# Altium PCB HIC15.PcbDoc
Units mm, origin at the board's own origin, x right, y up, seen from the top; angles counter-clockwise.
Board outline 33.3 x 27.8 mm, 2 copper layers (Top Layer, Bottom Layer), stack 1.58 mm thick; 39 components, 30 nets, 158 pads, 59 vias.
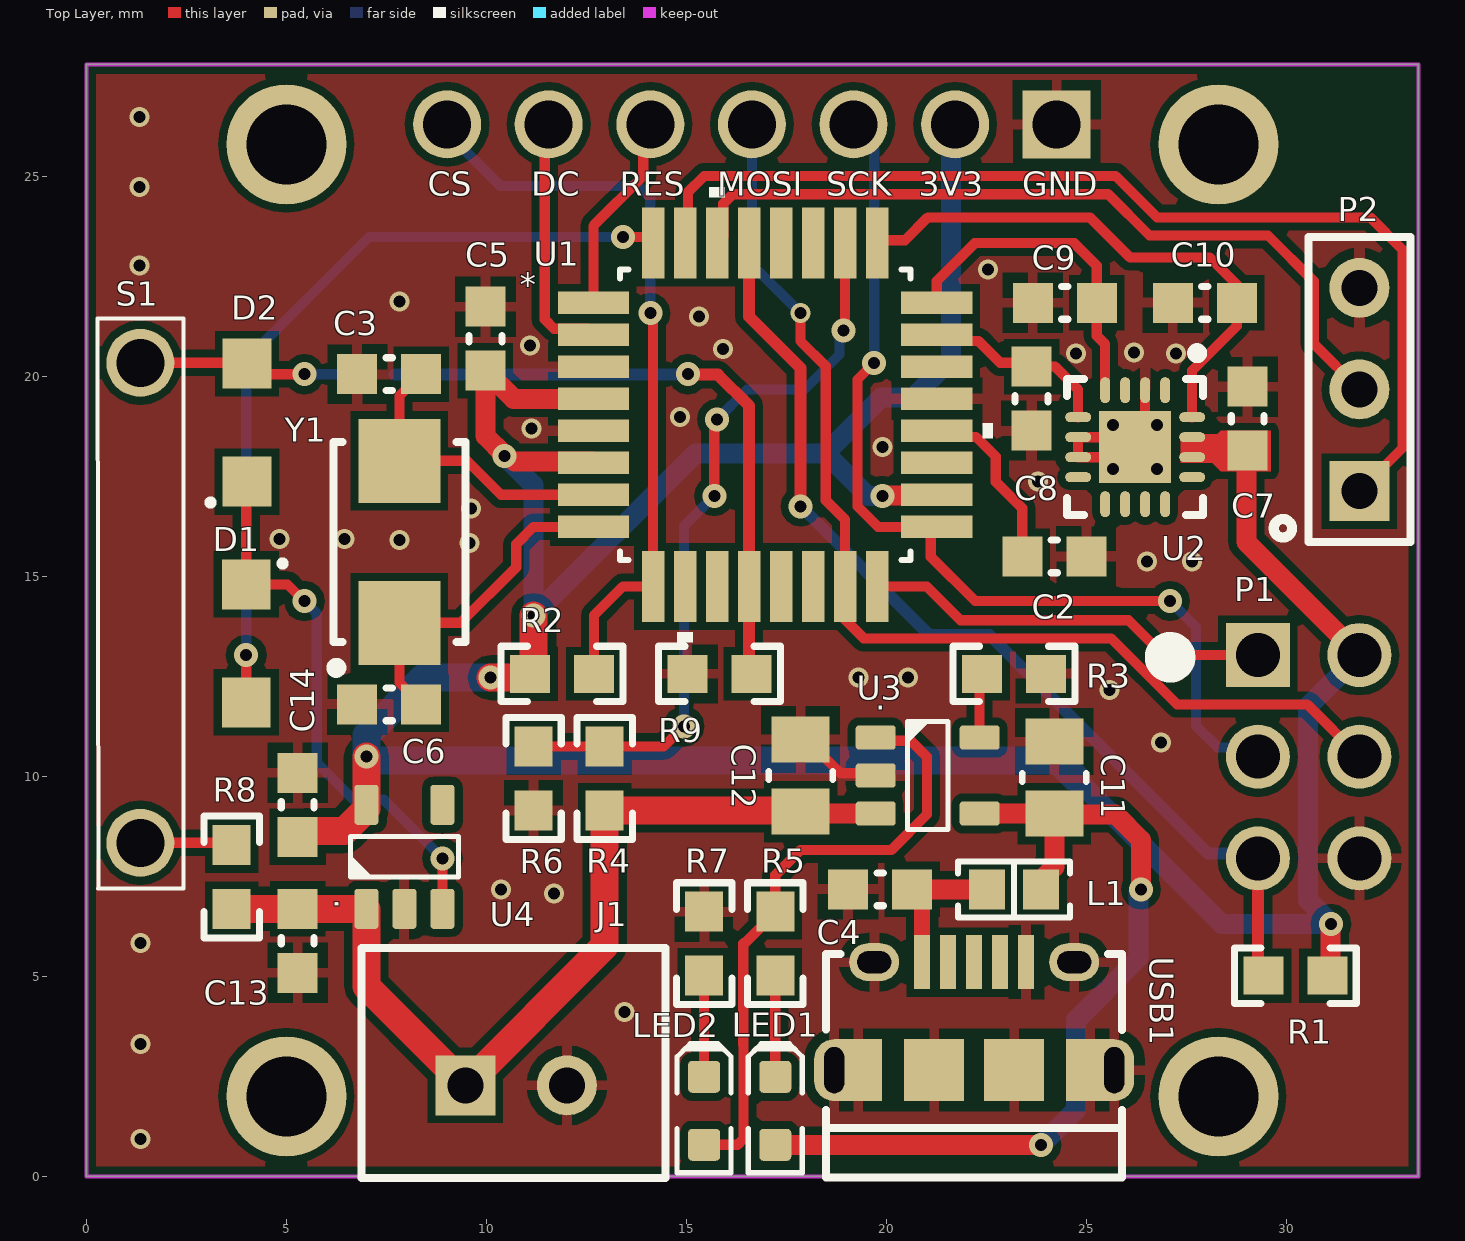
[diagram p0: Top Layer view]
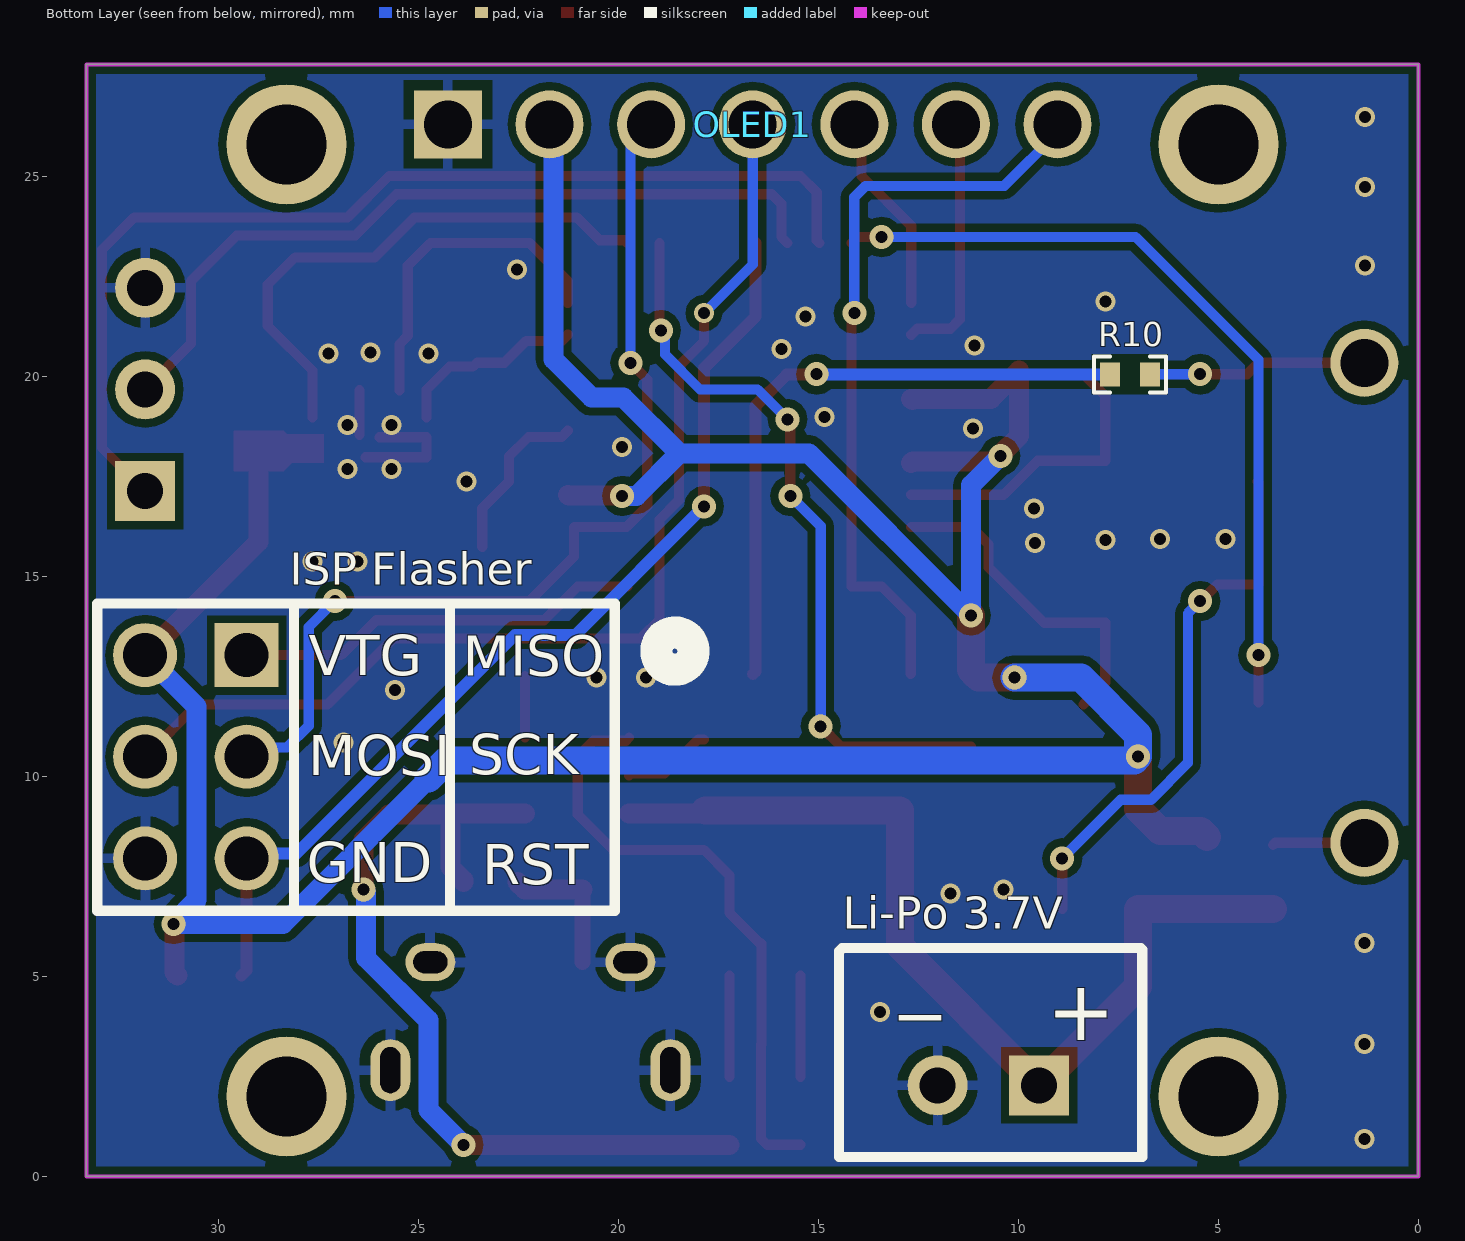
[diagram p1: Bottom Layer view, seen from below]
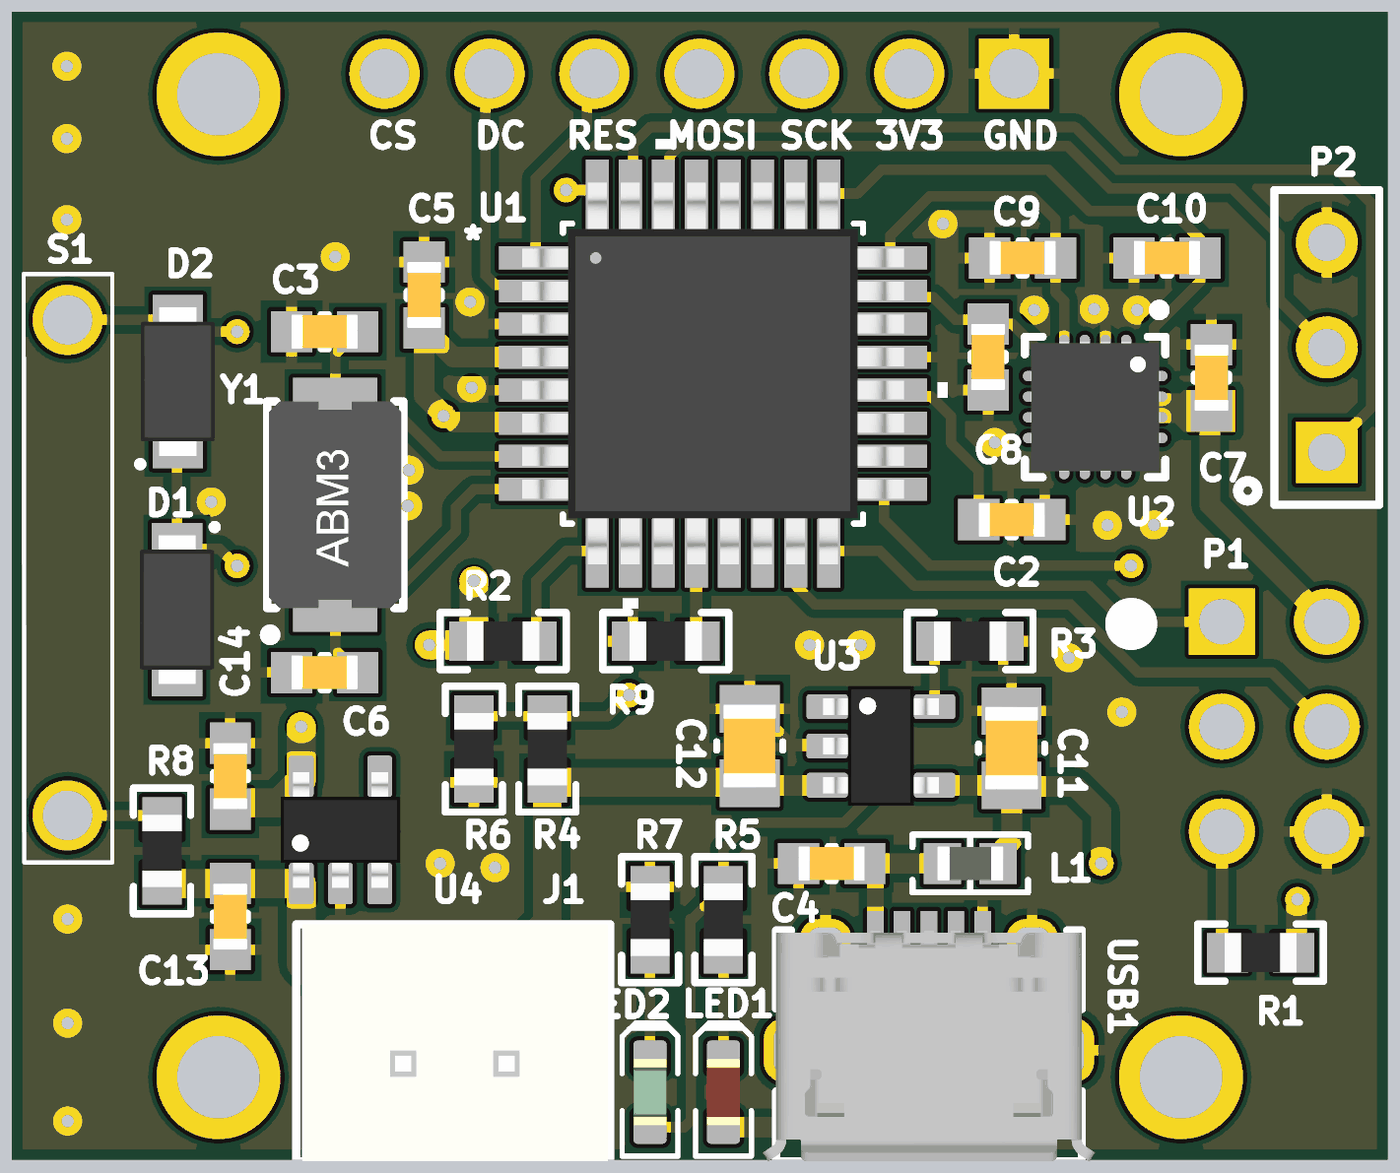
[diagram p2: 3D render of the assembled board from above, using the file's embedded part models]

## Layer stack, top to bottom
Top Solder: solder mask 0.01, Solder Resist, Dk 3.5
Top Layer: signal copper 0.036
Dielectric 1: dielectric 1.508, FR-4, Dk 4.8
Bottom Layer: signal copper 0.036
Bottom Solder: solder mask 0.01, Solder Resist, Dk 3.5

## Board outline
0,0 33.3,0 33.3,27.8 0,27.8

## Design rules (kind name [scope] priority, off if disabled: settings)
Clearance [All] p1: gap=0.2 ignorepadtopadclearanceinfootprint=FALSE except(0: Arc-Hole Track-Hole SMDPad-Hole THPad-Hole Via-Hole Fill-Hole Poly-Hole Region-Hole Text-Hole)
HoleSize [All] p1: absolutevalues=TRUE maxlimit=10 minlimit=0.025 maxpercent=80.000 minpercent=20.000
MinimumSolderMaskSliver [All] p1 off: minsoldermaskwidth=0.254
PlaneConnect [All] p1: pad.planeconnectstyle=Relief pad.reliefexpansion=0.508 pad.reliefentries=4 pad.reliefconductorwidth=0.254 pad.reliefairgap=0.254 via.planeconnectstyle=Direct via.reliefexpansion=0.508 via.reliefentries=4 via.reliefconductorwidth=0.254 via.reliefairgap=0.254
PolygonConnect [All] p1: thpad.connectstyle=Relief thpad.reliefconductorwidth=0.254 thpad.reliefentries=4 thpad.polygonreliefangle="90 Angle" thpad.airgapwidth=0.254 smdpad.connectstyle=Relief smdpad.reliefconductorwidth=0.254 smdpad.reliefentries=4 smdpad.polygonreliefangle="90 Angle" smdpad.airgapwidth=0.254 via.connectstyle=Direct via.reliefconductorwidth=0.254 via.reliefentries=4 via.polygonreliefangle="90 Angle" via.airgapwidth=0.254
RoutingVias [All] p1: holewidth=0.3 width=0.6 viastyle="Through Hole" minholewidth=0.2 minwidth=0.4 maxholewidth=5 maxwidth=10
SilkToSilkClearance [All] p1 off: silktosilkclearance=0.254
SilkToSolderMaskClearance [IsPad] p1 off: minsilkscreentomaskgap=0.254 clearancetoexposedcopper=TRUE
SolderMaskExpansion [IsVia] p1: expansion=0 soldermaskfromhole=TRUE
SolderMaskExpansion SolderMaskExpansion_1 [All] p2: expansion=0.102
Width [All] p1: maxlimit=1 minlimit=0.254 preferedwidth=0.254 minimp=50.000000 maximp=50.000000 favimp=50.000000
25 further rules are at their usual default settings.

## Components (designator, comment, footprint, x,y, rotation, side; value= is the part's Value field where it differs from the comment)
C2 "C0603" C0603 24.2,15.5 r0 top value=0.1uF
C3 "C0603" C0603 7.572,20.053 r180 top value=22pF
C4 "0603" C0603 19.844,7.175 r0 top value=10nF
C5 "C0603" C0603 9.979,20.941 r90 top value=0.1uF
C6 "C0603" C0603 7.572,11.798 r180 top value=22pF
C7 "C0603" C0603 29.035,18.94 r90 top value=0.1uF
C8 "C0603" C0603 23.631,19.441 r270 top value=5nF
C9 "C0603" C0603 24.463,21.837 r180 top value=5nF
C10 "C0603" C0603 27.962,21.837 r180 top value=5nF
C11 "0805" C0805 24.2,9.968 r270 top value=10µF
C12 "0805" C0805 17.859,10.02 r270 top value=10µF
C13 "0603" C0603 5.286,5.888 r90 top value=1uF
C14 "0603" C0603 5.286,9.288 r270 top value=1uF
D1 "MBR120VLSFT3G" SOD-123FL 3.997,13.322 r270 top value="20V 1A"
D2 "MBR120VLSFT3G" SOD-123FL 4.016,18.844 r90 top value="20V 1A"
J1 "BAT" HDR1X2 9.477,2.273 r0 top
L1 "0603" "FER 0603/1608" 23.198,7.175 r180 top value=220ohm
LED1 "LTST-C190KRKT" LED-0603-RED 17.224,1.638 r90 top
LED2 "LTST-C190KGKT" LED-0603-GREEN 15.446,1.638 r90 top
OLED1 "Header 7" CON-7 24.26,26.3 r180 bottom locked
P1 "Header 3X2" SPI_PORT 29.289,13.029 r0 top
P2 "Header 3" HDR1X3 31.829,17.132 r90 top
R1 "0603" R0603 30.225,5.014 r0 top value=10k
R2 "0603" R0603 11.89,12.56 r180 top value=10k
R3 "0603" R0603 23.193,12.56 r0 top value=2K
R4 "0603" R0603 12.96,9.944 r90 top value=28K
R5 "0603" R0603 17.224,5.814 r270 top value=470
R6 "0603" R0603 11.182,9.944 r270 top value=100K
R7 "0603" R0603 15.446,5.814 r270 top value=470
R8 "0603" R0603 3.635,7.48 r90 top value=28K
R9 "0603" R0603 15.827,12.56 r180 top value=100K
R10 "0402" R0402 7.21,20.05 r0 bottom value=10k
S1 "SW-PB" REED_SWITCH 1.349,14.338 r90 top
U1 "ATMEGA328P" 32A-M 16.97,19.037 r0 top
U2 "ADXL377" QFN50P300X300X150_HS-17L 26.221,18.228 r270 top
U3 "MCP73831T-2ACI/OT" SOT23-5 21.034,10.02 r0 top
U4 "MIC5504-3.3YM5TR" SOT23-5 7.953,7.988 r90 top value="3.3V 300mA"
USB1 "10118194-0001LF" 10118194-0001LF 22.198,2.654 r0 top
Y1 "16MHz" ABM3 7.826,15.862 r90 top

## Footprints (in the part's own frame and the unit in brackets; to place one, negate y for a bottom-side part, rotate by r counter-clockwise, add the part's x,y. Pads: shape width x height; smd on the part's side, far side on the other; paste and mask are expansions set on the pad)
32A-M [mil]
  rect 70x22 smd: 1(-169,110.25) 2(-169,78.75) 3(-169,47.25) 4(-169,15.75) 5(-169,-15.75) 6(-169,-47.25) 7(-169,-78.75) 8(-169,-110.25) 17(169,-110.25) 18(169,-78.75) 19(169,-47.25) 20(169,-15.75) 21(169,15.75) 22(169,47.25) 23(169,78.75) 24(169,110.25)
  rect 22x70 smd: 9(-110.25,-169) 10(-78.75,-169) 11(-47.25,-169) 12(-15.75,-169) 13(15.75,-169) 14(47.25,-169) 15(78.75,-169) 16(110.25,-169) 25(110.25,169) 26(78.75,169) 27(47.25,169) 28(15.75,169) 29(-15.75,169) 30(-47.25,169) 31(-78.75,169) 32(-110.25,169)
  silkscreen extent -143,-224 224,224, body extent -182,-182 182,182, height 47
10118194-0001LF [mm]
  rect 0.4x1.35 smd: 1(-1.3,2.7) 2(-0.65,2.7) 3(0,2.7) 4(0.65,2.7) 5(1.3,2.7)
  oval 1x1.55 hole 0.5 slot 1.15 at 90 deg: MT(-3.5,0) MT(3.5,0)
  rect 1.2x1.55 smd: MT(-2.9,0) MT(2.9,0)
  oval 1.25x0.95 hole 0.55 slot 0.85 at 0 deg: MT(-2.5,2.7) MT(2.5,2.7)
  rect 1.5x1.55 smd: MT(-1,0) MT(1,0)
  silkscreen extent -3.7,-2.69 3.7,2.9, body extent -4.02,-2.69 4.03,2.89, height 2.74
ABM3 [mm] "Molded Diode, 2-Leads, Body 5.00x3.20mm, IPC Medium Density"
  rect 2.1x2.05 smd: 1(-2.025,0) 2(2.025,0)
  silkscreen extent -3.27,-1.65 2.5,1.7, body extent -2.5,-1.6 2.5,1.6, height 1.3
C0603 [mm] "0603_095"
  rect 1x1 smd: 1(-0.8,0) 2(0.8,0)
  silkscreen extent -0.08,-0.41 0.08,0.41, body extent -0.93,-0.41 0.93,0.41, height 0.81
C0805 [mm] "0805 / 1.45mm height"
  rect 1.15x1.45 smd: 1(-0.9,0) 2(0.9,0)
  silkscreen extent -0.1,-0.8 0.1,0.8, body extent -1.09,-0.64 1.09,0.64, height 1.26
CON-7 [mm]
  rect 1.7x1.7 hole 1.2: 1(0,0)
  round 1.7 hole 1.2: 2(2.54,0) 3(5.08,0) 4(7.62,0) 5(10.16,0) 6(12.7,0) 7(15.24,0)
"FER 0603/1608" [mm] "Chip Ferrite, 2-Leads, Body 1.60x0.80mm, IPC Medium Density"
  rect 0.9x1 smd: 1(-0.675,0) 2(0.675,0)
  silkscreen extent -1.4,-0.7 1.4,0.7, body extent -0.8,-0.41 0.8,0.41, height 0.82
HDR1X2 [mm] "Connector; Header; 2 Position"
  rect 1.5x1.5 hole 0.9: 1(0,0)
  round 1.5 hole 0.9: 2(2.54,0)
  silkscreen extent -2.59,-2.31 5,3.43, body extent -2.46,-2.32 4.94,3.43, height 7
HDR1X3 [mm] "Connector; Header; 3 Position"
  rect 1.5x1.5 hole 0.9: 1(0,0)
  round 1.5 hole 0.9: 2(2.54,0) 3(5.08,0)
  silkscreen extent -1.27,-1.27 6.35,1.27
LED-0603-GREEN [mm]
  round 0.254 on Mech15: 0(0,0)
  rrect25% 0.8x0.8 smd: A(-0.85,0) C(0.85,0)
  silkscreen extent -1.55,-0.67 1.68,0.67, body extent -0.8,-0.4 0.8,0.4, height 0.75
LED-0603-RED [mm]
  round 0.254 on Mech15: 0(0,0)
  rrect25% 0.8x0.8 smd: A(-0.85,0) C(0.85,0)
  silkscreen extent -1.55,-0.67 1.68,0.67, body extent -0.8,-0.4 0.8,0.4, height 0.75
QFN50P300X300X150_HS-17L [mm] "QFN, 16-Leads, Body 3.00x3.00mm, Pitch 0.50mm, Thermal Pad 1.80x1.80mm, IPC High Density"
  oval 0.65x0.25 smd: 1(-1.425,0.75) 2(-1.425,0.25) 3(-1.425,-0.25) 4(-1.425,-0.75) 9(1.425,-0.75) 10(1.425,-0.25) 11(1.425,0.25) 12(1.425,0.75)
  oval 0.25x0.65 smd: 5(-0.75,-1.425) 6(-0.25,-1.425) 7(0.25,-1.425) 8(0.75,-1.425) 13(0.75,1.425) 14(0.25,1.425) 15(-0.25,1.425) 16(-0.75,1.425)
  rect 1.8x1.8 smd: 17(0,0)
  silkscreen extent -2.47,-1.7 1.7,1.7, body extent -1.57,-1.57 1.57,1.57, height 1.5
R0402 [mm]
  rect 0.5x0.6 smd mask+0.1: 1(-0.5,0) 2(0.5,0)
  silkscreen extent -0.9,-0.45 0.9,0.45, body extent -0.5,-0.25 0.5,0.26, height 0.33
R0603 [mm] "0603 from SM-752 data"
  rect 1x0.95 smd: 1(-0.8,0) 2(0.8,0)
  silkscreen extent -1.52,-0.69 1.52,0.69, body extent -0.87,-0.47 0.88,0.48, height 0.54
REED_SWITCH [mm] "SW"
  round 1.7 hole 1.2: 1(-6,0) 2(6,0)
  silkscreen extent -7.14,-1.08 7.11,1.06, body extent -7.12,-1.07 7.1,1.05, height 2.54
SOD-123FL [mm] "SODFL, 2-Leads, Body 1.65x3.60mm, IPC Medium Density"
  rect 1.25x1.22 smd: 1(-1.475,0) 2(1.475,0)
  silkscreen extent -2.05,0.86 -1.95,0.96, body extent -1.8,-0.9 1.8,0.9, height 0.98
SOT23-5 [mm]
  round 0.5 on Mech15: 0(0,0)
  rrect25% 1x0.6 smd: 1(-1.3,0.95) 2(-1.3,0) 3(-1.3,-0.95) 4(1.3,-0.95) 5(1.3,0.95)
  silkscreen extent -0.51,-1.35 0.51,1.35, body extent -1.4,-1.45 1.4,1.45, height 1.44
SPI_PORT [mm]
  rect 1.6x1.6 hole 1.1: 1(0,0)
  round 1.6 hole 1.1: 2(2.54,0) 3(0,-2.54) 4(2.54,-2.54) 5(0,-5.08) 6(2.54,-5.08)

## Part data
C2 C3 C5 C6 C7 C8 C9 C10: library part Cap_0603, "Capacitor"
C4: library part "Cap Semi", "CAP CER 10000PF 50V X7R 0402", Capacitance=10nF, Case/Package=0402, Case Code (Metric)=1005, Dielectric=X7R, Manufacturer=Murata, Manufacturer Part Number=GCM155R71H103KA55D, Max Operating Temperature=125°C, Min Operating Temperature=-55°C, Package Quantity=1, Ratings=AEC-Q200, Supplier Part Number 1=490-4762-1-ND, Tolerance=10%, Voltage=50V, Case Code (Imperial)=0402, ComponentLink1Description=http://www.murata.com/~/media/webrenewal/support/library/catalog/products/capacitor/mlcc/c02e.pdf, ComponentLink1URL=http://www.murata.com/~/media/webrenewal/support/library/catalog/products/capacitor/mlcc/c02e.pdf, ComponentLink2Description=https://datasheet.ciiva.com/16208/cl05b104kq5nnnc-16208343.pdf, ComponentLink2URL=https://datasheet.ciiva.com/16208/cl05b104kq5nnnc-16208343.pdf, ComponentLink3Description=https://datasheet.ciiva.com/26920/getdatasheetpartid-359683-26920169.pdf, ComponentLink3URL=https://datasheet.ciiva.com/26920/getdatasheetpartid-359683-26920169.pdf, ComponentLink4Description=https://datasheet.ciiva.com/26309/mlcc-catalogdownload2013-eng-26309003.pdf, ComponentLink4URL=https://datasheet.ciiva.com/26309/mlcc-catalogdownload2013-eng-26309003.pdf, ComponentLink5Description=https://datasheet.ciiva.com/29198/458718-da-01-en-vs-kondensator-0402-29198423.pdf, ComponentLink5URL=https://datasheet.ciiva.com/29198/458718-da-01-en-vs-kondensator-0402-29198423.pdf, ComponentLink6Description=https://datasheet.ciiva.com/16199/product-16199584.pdf, ComponentLink6URL=https://datasheet.ciiva.com/16199/product-16199584.pdf, ComponentLink7Description=https://datasheet.ciiva.com/18100/getdatasheetpartid-27433-18100656.pdf, ComponentLink7URL=https://datasheet.ciiva.com/18100/getdatasheetpartid-27433-18100656.pdf, ComponentLink8Description=https://datasheet.ciiva.com/130/product-130682.pdf, ComponentLink8URL=https://datasheet.ciiva.com/130/product-130682.pdf, ComponentLink9Description=https://datasheet.ciiva.com/11787/0900766b80ef92d0-11787082.pdf, ComponentLink9URL=https://datasheet.ciiva.com/11787/0900766b80ef92d0-11787082.pdf, ComponentLink10Description=https://datasheet.ciiva.com/130/product-130683.pdf, ComponentLink10URL=https://datasheet.ciiva.com/130/product-130683.pdf, ComponentLink11Description=https://datasheet.ciiva.com/130/product-130684.pdf, ComponentLink11URL=https://datasheet.ciiva.com/130/product-130684.pdf, ComponentLink12Description=https://datasheet.ciiva.com/2989/product-2989235.pdf, ComponentLink12URL=https://datasheet.ciiva.com/2989/product-2989235.pdf, ComponentLink13Description=https://datasheet.ciiva.com/16624/product-16624550.pdf, ComponentLink13URL=https://datasheet.ciiva.com/16624/product-16624550.pdf, Depth=0.5mm, Height=0.5mm, Lead Free="Lead Free", Length=1mm, Mount="Surface Mount", Packaging="Tape and Reel", Pricing 1="1=0.1, 10=0.048, 100=0.0215, 500=0.01538, 1000=0.01208, 2500=0.01098, 5000=0.0101 (USD)", Radiation Hardening=No, REACH SVHC="No SVHC", Stock 1=100000, Supplier 1=Digi-Key, Termination=SMD/SMT, Thickness=0.022inch, Voltage Rating=50V, Voltage Rating (DC)=50V, Width=0.02inch
C11 C12: library part "Cap Semi", "CAP CER 10UF 16V X5R 0805", Capacitance=10µF, Manufacturer="Murata Electronics North America", Manufacturer Part Number=GRM21BR61C106KE15K, Operating Temperature="-55°C ~ 85°C", Package / Case="0805 (2012 Metric)", Ratings=-, Supplier Part Number 1=490-6473-1-ND, Temperature Coefficient=X5R, Tolerance=±10%, Voltage - Rated=16V, Applications="General Purpose", Category=Capacitors, ComponentLink1Description=http://www.murata.com/~/media/webrenewal/support/library/catalog/products/capacitor/mlcc/c02e.pdf, ComponentLink1URL=http://www.murata.com/~/media/webrenewal/support/library/catalog/products/capacitor/mlcc/c02e.pdf, Features=-, Height - Seated (Max)=-, Lead Spacing=-, Lead Style=-, Mounting Type="Surface Mount, MLCC", Packaging="Cut Tape (CT)", Pricing 1="1=0.19, 10=0.13, 50=0.0748, 100=0.0618, 250=0.052, 500=0.04356, 1000=0.03575, 5000=0.03023 (USD)", RoHS="RoHS Compliant", Size / Dimension="0.079\" L x 0.049\" W (2.00mm x 1.25mm)", Stock 1=129274, Supplier 1=Digi-Key, Thickness (Max)="0.053\" (1.35mm)"
C13 C14: library part Cap, "Capacitor", LatestRevisionDate=17-Jul-2002, LatestRevisionNote="Re-released for DXP Platform.", PackageDescription="Radial Cap, Thru-Hole; 2 Leads; 0.3 in Pin Spacing", PackageReference=RAD-0.3, Published=8-Jun-2000, Publisher="Altium Limited"
D1 D2: library part "D Schottky", "DIODE SCHOTTKY 20V 1A SOD123FL", Average Rectified Current=1A, Forward Voltage=340mV, Manufacturer="ON Semiconductor", Max Forward Surge Current (Ifsm)=45A, Max Operating Temperature=125°C, Max Repetitive Reverse Voltage (Vrrm)=20V, Max Reverse Leakage Current=600uA, Min Operating Temperature=-65°C, Package Quantity=10000, Supplier Part Number 1=MBR120VLSFT3GOSCT-ND, ComponentLink1Description=http://www.onsemi.com/pub_link/Collateral/MBR0520LT1-D.PDF, ComponentLink1URL=http://www.onsemi.com/pub_link/Collateral/MBR0520LT1-D.PDF, ComponentLink2Description=https://datasheet.ciiva.com/4715/mbr120vlsft1-d-107081-4715104.pdf, ComponentLink2URL=https://datasheet.ciiva.com/4715/mbr120vlsft1-d-107081-4715104.pdf, ComponentLink3Description=https://datasheet.ciiva.com/6380/mbr120vlsft1-d-6380907.pdf, ComponentLink3URL=https://datasheet.ciiva.com/6380/mbr120vlsft1-d-6380907.pdf, ComponentLink4Description=https://datasheet.ciiva.com/8294/mbr120vlsft1-d-8294603.pdf, ComponentLink4URL=https://datasheet.ciiva.com/8294/mbr120vlsft1-d-8294603.pdf, ComponentLink5Description=https://datasheet.ciiva.com/6380/mbr120vlsft1-d-6380910.pdf, ComponentLink5URL=https://datasheet.ciiva.com/6380/mbr120vlsft1-d-6380910.pdf, Current Rating=1A, Element Configuration=Single, Forward Current=1A, Halogen Free="Halogen Free", Lead Free="Lead Free", Manufacturer Part Number=MBR120VLSFT3G, Max Reverse Voltage (DC)=20V, Max Surge Current=45A, Number of Pins=2, Output Current=1A, Packaging="Tape and Reel", Peak Non-Repetitive Surge Current=45A, Peak Reverse Current=600uA, Polarity=Standard, Pricing 1="1=0.42, 10=0.338, 100=0.2298, 500=0.17234, 1000=0.12926 (USD)", Radiation Hardening=No, REACH SVHC="No SVHC", Stock 1=46165, Supplier 1=Digi-Key, Voltage Rating (DC)=20V
J1: library part "Header 2", "Header, 2-Pin", LatestRevisionDate=17-Jul-2002, LatestRevisionNote="Re-released for DXP Platform.", Publisher="Altium Limited"
L1: library part "Ferrite Chip", "FERRITE BEAD 220 OHM 0603 1LN", Case Code (Metric)=1608, Current Rating=2A, DC Resistance (DCR)=50mR, Frequency=100MHz, Manufacturer=Murata, Manufacturer Part Number=BLM18EG221SN1D, Max Operating Temperature=125°C, Min Operating Temperature=-55°C, Package Quantity=1, Supplier Part Number 1=490-3992-1-ND, Tolerance=25%, Case/Package=0603, Case Code (Imperial)=0603, ComponentLink1Description=http://components.arrow.com/part/dataview/0323_06096831, ComponentLink1URL=http://components.arrow.com/part/dataview/0323_06096831, ComponentLink2Description=http://www.murata.com/en-us/products/productdata/8796740354078/QNFA9102.pdf, ComponentLink2URL=http://www.murata.com/en-us/products/productdata/8796740354078/QNFA9102.pdf, ComponentLink3Description=http://search.murata.co.jp/Ceramy/image/img/PDF/ENG/L0132S0193BLM21P.pdf, ComponentLink3URL=http://search.murata.co.jp/Ceramy/image/img/PDF/ENG/L0132S0193BLM21P.pdf, ComponentLink4Description=http://www.mouser.com/ds/2/281/c31e-794748.pdf, ComponentLink4URL=http://www.mouser.com/ds/2/281/c31e-794748.pdf, ComponentLink5Description=https://datasheet.ciiva.com/46634/beads-commercial-power-mpz-en-46634741.pdf, ComponentLink5URL=https://datasheet.ciiva.com/46634/beads-commercial-power-mpz-en-46634741.pdf, ComponentLink6Description=https://datasheet.ciiva.com/46634/beads-commercial-power-mpz-en-46634632.pdf, ComponentLink6URL=https://datasheet.ciiva.com/46634/beads-commercial-power-mpz-en-46634632.pdf, ComponentLink7Description=https://datasheet.ciiva.com/46634/beads-commercial-power-mpz-en-46634712.pdf, ComponentLink7URL=https://datasheet.ciiva.com/46634/beads-commercial-power-mpz-en-46634712.pdf, ComponentLink8Description=https://datasheet.ciiva.com/48682/beads-commercial-power-mpz-en-48682492.pdf, ComponentLink8URL=https://datasheet.ciiva.com/48682/beads-commercial-power-mpz-en-48682492.pdf, ComponentLink9Description=https://datasheet.ciiva.com/11799/0900766b811b5866-11799010.pdf, ComponentLink9URL=https://datasheet.ciiva.com/11799/0900766b811b5866-11799010.pdf, ComponentLink10Description=https://datasheet.ciiva.com/41449/001171699-da-01-en-chip-drossel0603-220r-2000ma-1-6x0-8mm-41449376.pdf, ComponentLink10URL=https://datasheet.ciiva.com/41449/001171699-da-01-en-chip-drossel0603-220r-2000ma-1-6x0-8mm-41449376.pdf, ComponentLink11Description=https://datasheet.ciiva.com/41449/001172265-da-01-en-drossel-0603-220r-1-6x0-8mm-4000st-41449579.pdf, ComponentLink11URL=https://datasheet.ciiva.com/41449/001172265-da-01-en-drossel-0603-220r-1-6x0-8mm-4000st-41449579.pdf, ComponentLink12Description=https://datasheet.ciiva.com/1467/5169-1467157.pdf, ComponentLink12URL=https://datasheet.ciiva.com/1467/5169-1467157.pdf, ComponentLink13Description=https://datasheet.ciiva.com/1467/5169-1467158.pdf, ComponentLink13URL=https://datasheet.ciiva.com/1467/5169-1467158.pdf, ComponentLink14Description=https://datasheet.ciiva.com/1012/l0110s0101blm18e-1012872.pdf, ComponentLink14URL=https://datasheet.ciiva.com/1012/l0110s0101blm18e-1012872.pdf, ComponentLink15Description=https://datasheet.ciiva.com/1012/l0110s0101blm18e-1012873.pdf, ComponentLink15URL=https://datasheet.ciiva.com/1012/l0110s0101blm18e-1012873.pdf, ComponentLink16Description=https://datasheet.ciiva.com/1012/l0110s0101blm18e-1012874.pdf, ComponentLink16URL=https://datasheet.ciiva.com/1012/l0110s0101blm18e-1012874.pdf, ComponentLink17Description=https://datasheet.ciiva.com/8510/l0110s0101blm18e-8510140.pdf, ComponentLink17URL=https://datasheet.ciiva.com/8510/l0110s0101blm18e-8510140.pdf, ComponentLink18Description=https://datasheet.ciiva.com/14122/blm-series-eng-tds-14122908.pdf, ComponentLink18URL=https://datasheet.ciiva.com/14122/blm-series-eng-tds-14122908.pdf, ComponentLink19Description=https://datasheet.ciiva.com/16419/l0110s0101blm18e-16419148.pdf, ComponentLink19URL=https://datasheet.ciiva.com/16419/l0110s0101blm18e-16419148.pdf, ComponentLink20Description=https://datasheet.ciiva.com/17246/l0110s0101blm18e-17246927.pdf, ComponentLink20URL=https://datasheet.ciiva.com/17246/l0110s0101blm18e-17246927.pdf, Contact Plating=Tin,Matte, Core Material=Ferrite, DC Current=2A, Depth=0.8mm, Height=0.8mm, Impedance=220R, Lead Free="Lead Free", Length=1.6mm, Material=Steel,Ferrite, Max Current Rating=2A, Max DC Current=2A, Military Standard=Not, Number of Circuits=1, Number of Lines=1, Number of Pins=2, Packaging="Tape and Reel", Pricing 1="1=0.23, 10=0.175, 25=0.1452, 50=0.1252, 100=0.1126, 250=0.09508, 500=0.08508, 1000=0.07257 (USD)", Radiation Hardening=No, REACH SVHC="No SVHC", Resistance=50mR, Stock 1=618017, Supplier 1=Digi-Key, Termination=SMD/SMT, Test Frequency=100MHz, Width=0.8mm
LED1: library part LED0603DWS, "LED, GREEN, 0.9MM X 1.1MM, 10MCD, 570NM", Color=Red, Current - Test=20mA, Lens Color=Colorless, Manufacturer="Lite-On Inc.", Millicandela Rating=99mcd, Package / Case="0603 (1608 Metric)", Supplier Part Number 1=160-1436-1-ND, Voltage - Forward (Vf) (Typ)=2V, Category=Optoelectronics, ComponentLink1Description=http://optoelectronics.liteon.com/upload/download/DS-22-99-0151/S_110_LTST-C190KRKT.pdf, ComponentLink1URL=http://optoelectronics.liteon.com/upload/download/DS-22-99-0151/S_110_LTST-C190KRKT.pdf, Features=-, Height (Max)=0.80mm, Lens Style/Size="Rectangle with Flat Top, 1.10mm x 0.80mm", Lens Transparency=Clear, Manufacturer Part Number=LTST-C190KRKT, Mounting Type="Surface Mount", Packaging="Cut Tape (CT)", Pricing 1="1=0.24, 10=0.186, 100=0.1015, 250=0.06768, 500=0.05752, 1000=0.04399 (USD)", RoHS="RoHS Compliant", Size / Dimension="1.60mm L x 0.80mm W", Stock 1=274428, Supplier 1=Digi-Key, Viewing Angle=130°, Wavelength - Dominant=631nm, Wavelength - Peak=639nm
LED2: library part LED0603DWS, "LED GREEN CLEAR 0603 SMD", Color=Green, Current - Test=20mA, Lens Color=Colorless, Manufacturer="Lite-On Inc.", Millicandela Rating=35mcd, Package / Case="0603 (1608 Metric)", Supplier Part Number 1=160-1435-1-ND, Voltage - Forward (Vf) (Typ)=2V, Category=Optoelectronics, ComponentLink1Description=http://optoelectronics.liteon.com/upload/download/DS22-2000-074/S_110_LTST-C190KGKT.pdf, ComponentLink1URL=http://optoelectronics.liteon.com/upload/download/DS22-2000-074/S_110_LTST-C190KGKT.pdf, Features=-, Height (Max)=0.80mm, Lens Style/Size="Rectangle with Flat Top, 1.10mm x 0.80mm", Lens Transparency=Clear, Manufacturer Part Number=LTST-C190KGKT, Mounting Type="Surface Mount", Packaging="Cut Tape (CT)", Part Status=Active, Pricing 1="1=0.27, 10=0.196, 25=0.1448, 100=0.1034, 250=0.07032, 500=0.06204, 1000=0.0486 (USD)", RoHS="RoHS Compliant", Size / Dimension="1.60mm L x 0.80mm W", Stock 1=777009, Supplier 1=Digi-Key, Viewing Angle=130°, Wavelength - Dominant=571nm, Wavelength - Peak=574nm
OLED1: "Header, 7-Pin", LatestRevisionDate=17-Jul-2002, LatestRevisionNote="Re-released for DXP Platform.", Publisher="Altium Limited"
P1: "Header, 3-Pin, Dual row", LatestRevisionDate=17-Jul-2002, LatestRevisionNote="Re-released for DXP Platform.", Publisher="Altium Limited"
P2: "Header, 3-Pin", LatestRevisionDate=17-Jul-2002, LatestRevisionNote="Re-released for DXP Platform.", Publisher="Altium Limited"
R1 R2 R3 R4 R5 R6 R7 R8 R9 R10: library part Res3, "Resistor"
S1: "Switch", LatestRevisionDate=17-Jul-2002, LatestRevisionNote="Re-released for DXP Platform.", PackageDescription="Switch; 2 Leads", PackageReference=SPST-2, Published=24-Mar-1999, Publisher="Altium Limited"
U1: library part ATMEGA328P_AU
U3: "IC CONTROLLR LI-ION 4.2V SOT23-5", Battery Pack Voltage=4.2V, Charge Current - Max=500mA, Current - Charging="Constant - Programmable", Manufacturer="Microchip Technology", Operating Temperature="-40°C ~ 85°C (TA)", Package / Case="SC-74A, SOT-753", Supplier Device Package=SOT-23-5, Supplier Part Number 1=MCP73831T-2ACI/OTCT-ND, Voltage - Supply (Max)=6V, Battery Chemistry=Lithium-Ion/Polymer, Category="Integrated Circuits (ICs)", ComponentLink1Description=http://www.microchip.com/mymicrochip/filehandler.aspx?ddocname=en025112, ComponentLink1URL=http://www.microchip.com/mymicrochip/filehandler.aspx?ddocname=en025112, Fault Protection="Over Voltage", Interface=-, Manufacturer Part Number=MCP73831T-2ACI/OT, Number of Cells=1, Packaging="Cut Tape (CT)", Part Status=Active, Pricing 1="1=0.58, 25=0.484, 100=0.4326 (USD)", Programmable Features=Current, RoHS="RoHS Compliant", Stock 1=18101, Supplier 1=Digi-Key
U4: "IC REG LINEAR 3.3V 300MA SOT23-5", Case/Package=SOT-23-5, Dropout Voltage=380mV, Manufacturer="Microchip Micrel", Max Input Voltage=5.5V, Max Operating Temperature=125°C, Max Output Current=300mA, Min Input Voltage=2.5V, Min Operating Temperature=-40°C, Nominal Output Voltage=3.3V, Operating Supply Current=42uA, Power Supply Rejection Ratio (PSRR)=60dB, Quiescent Current=38uA, Supplier Part Number 1=576-4764-1-ND, Accuracy=3%, ComponentLink1Description=http://www.diodes.com/_files/datasheets/AP2204.pdf, ComponentLink1URL=http://www.diodes.com/_files/datasheets/AP2204.pdf, ComponentLink2Description=https://datasheet.ciiva.com/46425/1856860-46425639.pdf, ComponentLink2URL=https://datasheet.ciiva.com/46425/1856860-46425639.pdf, Height=1.1mm, Length=2.9mm, Manufacturer Part Number=MIC5504-3.3YM5TR, Mount="Surface Mount", Number of Outputs=1, Number of Pins=5, Output Current=300mA, Output Voltage=3.3V, Packaging="Tape and Reel", Pricing 1="1=0.11, 25=0.0928 (USD)", REACH SVHC="No SVHC", Stock 1=128319, Supplier 1=Digi-Key, Width=1.6mm
USB1: library part 1050170001, "CONN USB MICRO B RECPT SMT R/A", Colour=Black, Current Rating=1.8A, Flammability Rating="UL94 V-0", Insulation Resistance=1GR, Manufacturer="Amphenol FCI", Max Operating Temperature=85°C, Max Voltage Rating (AC)=100V, Min Operating Temperature=-55°C, Package Quantity=9600, Supplier Part Number 1=609-4618-1-ND, ComponentLink1Description=http://portal.fciconnect.com/Comergent//fci/drawing/10118194.pdf, ComponentLink1URL=http://portal.fciconnect.com/Comergent//fci/drawing/10118194.pdf, ComponentLink2Description=https://datasheet.ciiva.com/4598/10118194ac-197217-4598807.pdf, ComponentLink2URL=https://datasheet.ciiva.com/4598/10118194ac-197217-4598807.pdf, ComponentLink3Description=https://datasheet.ciiva.com/29907/10118194-29907230.pdf, ComponentLink3URL=https://datasheet.ciiva.com/29907/10118194-29907230.pdf, ComponentLink4Description=https://datasheet.ciiva.com/26945/getdatasheetpartid-418619-26945695.pdf, ComponentLink4URL=https://datasheet.ciiva.com/26945/getdatasheetpartid-418619-26945695.pdf, ComponentLink5Description=https://datasheet.ciiva.com/851/10118194-851110.pdf, ComponentLink5URL=https://datasheet.ciiva.com/851/10118194-851110.pdf, ComponentLink6Description=https://datasheet.ciiva.com/851/10118194-851111.pdf, ComponentLink6URL=https://datasheet.ciiva.com/851/10118194-851111.pdf, Connector Type=USB,Receptacle, Contact Material="Copper Alloy", Contact Plating=Gold, Depth=5mm, Features=Shielded, Gender=Receptacle, Housing Material=Polymer, Lead Free="Lead Free", Length=8.05mm, Manufacturer Part Number=10118194-0001LF, Mount="Surface Mount,Horizontal", Number of Contacts=5, Number of Ports=1, Number of Terminals=5, Orientation="Right Angle", Packaging="Tape and Reel", Pitch=0.65mm, Pricing 1="1=0.5, 10=0.464, 25=0.418, 50=0.3716, 100=0.3561, 250=0.32516, 500=0.30966 (USD)", Radiation Hardening=No, Stock 1=183871, Supplier 1=Digi-Key, Termination=Solder
Y1: library part XTAL, "Crystal Oscillator"

## Free pads (board coordinates)
  round 3 hole 2 unplated: 18(5,2) 18(5,25.8) 18(28.3,2) 18(28.3,25.8)

## Via types
v1: diameter 0.5, hole 0.3, Top Layer to Bottom Layer, 37 vias
v2: diameter 0.6, hole 0.3, Top Layer to Bottom Layer, 22 vias

## Nets (pads, with @x,y where several pads share a name; then routed paths per layer and width w, separated by ;. In a path a pad name is that pad's centre, name@x,y a point inside that pad or via, vN(x,y) a via of type N, cw(c..) or ccw(c..) an arc to the next point about the centre after c; other vN are vias at no path point)
5V: C11.2 L1.1 LED1.A U3.4 | length 21.5
  Top Layer w0.5: LED1.A v2(23.873,0.788) ; U3.4 22.336,9.068 C11.2 ; L1.1@23.873,7.353 23.873,7.403 24.2,7.73 C11.2 ; v2(26.368,7.175) 26.368,8.408 25.733,9.043 24.225,9.043 C11.2
  Bottom Layer w0.5: v2(23.873,0.788) 24.748,1.663 24.748,3.903 26.305,5.46 26.305,7.112 v2(26.368,7.175)
_REG_EN: D1.2 U1.32 | length 20.1
  Top Layer w0.254: D1.2 v2(3.997,13.029) ; v2(13.414,23.482) 14.017,23.482 U1.32
  Bottom Layer w0.254: v2(3.997,13.029) 3.997,20.412 7.067,23.482 v2(13.414,23.482)
BAT_MEASURE: R4.2 R6.1 U1.26 | length 18.6
  Top Layer w0.254: R6.1 R4.2 14.434,10.744 v2(14.94,11.25) ; v2(15.7,17.01) 15.7,18.856 v2(15.77,18.926) ; v2(18.931,21.15) 18.97,21.19 U1.26
  Bottom Layer w0.254: v2(14.94,11.25) 14.94,16.25 v2(15.7,17.01) ; v2(15.77,18.926) 16.516,19.672 17.957,19.672 18.829,20.544 18.829,21.048 v2(18.931,21.15)
GND: C2.2 C3.2 C4.1 C5.2 C6.2 C7.2 C8.2 C9.2 C10.2 C11.1 C12.1 C13.1 C14.1 J1.2 OLED1.1 P1.6 P2.3 R3.2 R6.2 R7.1 R9.2 U1.3 U1.5 U1.21 U2.2 U2.6 U2.7 U2.17 U3.2 U4.2 USB1.5 USB1.MT | length 6.6
  Top Layer w0.254: C12.1 18.009,10.92 18.853,10.076 19.678,10.076 U3.2 ; U2.17@25.971,18.478 U2.6 U2.7 U2.17@26.316,17.978 ; U2.17@26.471,18.529 U2.2
  other v1: 1.349,0.937 1.349,3.309 13.46,4.11 1.349,5.829 11.694,7.076 10.366,7.175 26.868,10.842 25.584,12.156 19.309,12.465 20.547,12.465 26.518,15.365 27.646,15.373 9.582,15.833 7.826,15.903 4.826,15.929 6.453,15.929 9.612,16.7 23.79,17.369 25.671,17.678 26.771,17.678 19.905,18.228 11.128,18.698 25.671,18.778 26.771,18.778 14.84,18.978 24.747,20.574 27.241,20.574 26.198,20.598 15.922,20.687 11.09,20.772 15.319,21.491 7.826,21.868 22.537,22.666 1.33,22.765 1.33,24.727 1.33,26.48
MISO: P1.1 U1.16 | length 10.2
  Top Layer w0.254: U1.16 21.015,14.744 21.856,13.903 26.055,13.903 26.929,13.029 P1.1
MOSI: OLED1.4 P1.4 U1.15 | length 27.6
  Top Layer w0.254: v1(17.859,21.577) 17.857,21.575 17.857,20.879 18.486,20.25 18.486,16.9 18.97,16.416 U1.15 18.97,13.914 19.435,13.449 25.616,13.449 27.267,11.798 30.52,11.798 P1.4
  Bottom Layer w0.254: OLED1.4 16.64,22.796 v1(17.859,21.577)
NetC2_1: C2.1 U1.20 | length 4.3
  Top Layer w0.254: U1.20 21.415,18.485 22.246,18.485 22.735,17.995 22.735,17.365 23.4,16.7 C2.1@23.4,15.74
NetC4_2: C4.2 L1.2 USB1.1 | length 3.5
  Top Layer w0.4: USB1.1 C4.2@20.898,7.175
  Top Layer w0.5: C4.2@20.898,7.175 22.345,7.175 L1.2@22.523,7.353
NetD2_2: D2.2 R10.1 S1.2 | length 5.5
  Top Layer w0.254: S1.2 3.997,20.338 D2.2 4.282,20.053 v2(5.452,20.053)
  Bottom Layer w0.254: v2(5.452,20.053) 5.455,20.05 R10.1
NetLED1_C: LED1.C R5.2 | length 2.5
  Top Layer w0.254: LED1.C R5.2
NetLED2_C: LED2.C R7.2 | length 2.5
  Top Layer w0.254: LED2.C R7.2
NetR3_1: R3.1 U3.5 | length 1.5
  Top Layer w0.254: U3.5 R3.1@22.334,12.501
NetR8_2: R8.2 S1.1 | length 2.3
  Top Layer w0.254: S1.1 3.577,8.338 R8.2
NRST: P1.5 R1.1 U1.29 | length 25.2
  Top Layer w0.3: U1.29 16.57,21.491 17.859,20.202 v2(17.859,16.751) ; P1.5 29.289,5.15 R1.1
  Bottom Layer w0.3: v2(17.859,16.751) 21.08,13.53 22.585,13.53 28.039,8.076 29.162,8.076 P1.5
OLED_CS: OLED1.7 R2.1 U1.9 | length 19
  Top Layer w0.254: R2.1 12.69,14.02 13.414,14.744 U1.9 14.17,21.507 v2(14.1,21.577)
  Bottom Layer w0.254: OLED1.7 9.02,26.09 10.35,24.76 13.815,24.76 14.1,24.475 v2(14.1,21.577)
OLED_DC: OLED1.6 U1.2 | length 6.3
  Top Layer w0.254: OLED1.6 11.461,26.201 11.461,21.423 11.694,21.19 12.525,21.19 U1.2
OLED_RES: OLED1.5 U1.1 | length 5.1
  Top Layer w0.254: U1.1 12.677,23.761 13.922,25.006 13.922,26.122 OLED1.5
OSC8_1: C3.1 U1.7 Y1.2 | length 7.6
  Top Layer w0.254: C3.1 7.826,19.507 Y1.2 9.516,17.887 10.366,17.037 U1.7
OSC8_2: C6.1 U1.8 Y1.1 | length 8.4
  Top Layer w0.254: C6.1 7.826,12.344 Y1.1 9.357,13.837 10.747,15.227 10.747,15.802 11.182,16.237 U1.8
REEL_SW: R9.1 R10.2 U1.12 | length 15.9
  Top Layer w0.3: v2(15.04,20.053) 15.053,20.04 15.79,20.04 16.57,19.26 U1.12 16.57,12.617 R9.1
  Bottom Layer w0.3: R10.2 15.037,20.05 v2(15.04,20.053)
REG_EN: D1.1 D2.1 U4.3 | length 13.8
  Top Layer w0.254: D2.1 3.997,17.35 D1.1 5.029,14.797 5.446,14.38 v2(5.452,14.38) ; U4.3 v2(8.903,7.949)
  Bottom Layer w0.254: v2(5.452,14.38) 5.76,14.072 5.76,10.335 6.68,9.415 7.437,9.415 v2(8.903,7.949)
RXI: P2.2 U1.30 | length 20
  Top Layer w0.254: U1.30 15.922,23.482 15.922,24.313 16.162,24.552 25.545,24.552 26.578,23.519 29.542,23.519 30.686,22.375 30.686,20.815 P2.2
SCK: OLED1.3 P1.3 U1.17 | length 24.4
  Top Layer w0.254: v2(19.698,20.338) 19.278,19.918 19.278,16.75 19.792,16.237 21.11,16.237 21.11,15.49 22.215,14.385 v2(27.088,14.385)
  Bottom Layer w0.254: OLED1.3 19.698,25.782 v2(19.698,20.338) ; v2(27.088,14.385) 27.74,13.733 27.74,11.265 28.282,10.722 28.691,10.722 28.925,10.489 P1.3
STAT: LED2.A R5.1 U3.1 | length 15.3
  Top Layer w0.254: LED2.A 16.283,0.788 16.432,0.937 16.432,3.293 16.422,3.303 16.422,5.819 16.432,5.829 16.464,5.829 17.224,6.589 R5.1 17.224,7.526 17.859,8.161 20.133,8.161 21.015,9.043 21.015,10.489 20.615,10.889 19.815,10.889 U3.1
TXO: P2.1 U1.31 | length 26.6
  Top Layer w0.254: U1.31 15.04,23.399 15.04,24.6 15.446,25.006 25.733,25.006 26.766,23.973 32.1,23.973 32.906,23.167 32.906,18.209 P2.1
VBAT: C12.2 C13.2 J1.1 R4.1 R8.1 U3.3 U4.1 | length 23.9
  Top Layer w0.5: C12.2@17.835,9.144 C12.2 17.909,9.07 U3.3
  Top Layer w0.7: R8.1 3.643,6.688 C13.2 U4.1 7.003,4.747 J1.1 12.96,5.756 R4.1 C12.2@17.835,9.144
VCC3V3: C5.1 C7.1 C14.2 OLED1.2 P1.2 R1.2 R2.2 U1.4 U1.6 U1.18 U2.14 U2.15 U4.5 | length 85.3
  Top Layer w0.5: v2(10.45,18.01) 10.45,18.037 9.979,18.508 C5.1 10.683,19.437 U1.4 U1.4@12.649,19.409 ; v2@10.709,17.866 12.648,17.866 U1.6 ; v2(19.905,17.01) 19.918,17.023 21.249,17.023 U1.18 ; C7.1@29.289,18.362 29,18.073 29,15.858 P1.2 ; R1.2 31.101,5.09 31.101,6.286 v2(31.12,6.305)
  Top Layer w0.7: C14.2 5.436,8.638 6.453,8.638 7.003,9.188 U4.5 v2(7.003,10.489) ; v2(10.1,12.465) 10.995,12.465 R2.2 11.182,12.652 v2(11.182,14.02)
  Bottom Layer w0.5: v2@10.431,18.029 v2(10.45,18.01) 11.182,17.278 v2(11.182,14.02) 15.237,18.075 18.479,18.075 ; v2(19.905,17.01) 19.544,17.01 18.479,18.075 ; OLED1.2 21.62,26.2 21.62,20.423 20.666,19.469 19.873,19.469 18.479,18.075 ; 24.748,9.942 28.385,6.305 v2(31.12,6.305) 31.12,6.332 30.539,6.913 30.539,11.739 P1.2
  Bottom Layer w0.7: v2(10.1,12.465) 8.43,12.465 7.003,11.038 v2(7.003,10.489) 7.092,10.4 24.29,10.4 24.748,9.942
XOUT: C8.1 U1.23 U2.5 | length 4.8
  Top Layer w0.254: U1.23 21.415,20.885 22.301,20.885 22.848,20.338 23.534,20.338 C8.1 24.222,20.241 24.796,19.666 U2.5
YOUT: C9.1 U1.24 U2.4 | length 8.4
  Top Layer w0.254: U1.24 21.263,22.382 22.211,23.33 24.698,23.33 25.263,22.765 C9.1 25.263,21.013 25.471,20.804 U2.4
ZOUT: C10.1 U1.25 U2.16 | length 13.7
  Top Layer w0.254: U1.25 19.84,23.399 20.466,23.399 21.04,23.973 25.09,23.973 26.089,22.974 28.082,22.974 28.762,22.294 C10.1 28.762,21.259 27.646,20.144 U2.16
pads on no net: LED1.0 LED2.0 U1.10 U1.11 U1.13 U1.14 U1.19 U1.22 U1.27 U1.28 U2.1 U2.3 U2.8 U2.9 U2.10 U2.11 U2.12 U2.13 U3.0 U4.0 U4.4 USB1.2 USB1.3 USB1.4

## Polygon pours and split planes (outlines as drawn)
GND on Top Layer "Top Layer-GND" (solid, remove dead copper, pour order 4): 0,27.8 33.3,27.8 33.3,0 0,0
GND on Bottom Layer "Bottom Layer-GND" (solid, pour order 6): 0,0 33.31,0 33.31,27.8 0,27.8

## Keep-outs
Keep-Out Layer:
  the board outline again, w0.1

## Other copper
Top Layer:
  region net VCC3V3: 27.366,18.553 28.276,18.553 28.363,18.64 29.615,18.64 29.615,17.629 28.363,17.629 28.152,17.839 27.366,17.839

## Silkscreen, mask and mechanical layers (free items; w line width, h text height)
Top Overlay:
  circle w0.8: c27.095,12.975 r0.23
  circle w0.254: c29.915,16.2 r0.23
  text "CS" at 8.535,24.52 h0.6
  text "DC" at 11.128,24.52 h0.6
  text "RES" at 13.338,24.52 h0.6
  text "MOSI" at 15.77,24.52 h0.6
  text "SCK" at 18.498,24.52 h0.6
  text "3V3" at 20.806,24.52 h0.6
  text "GND" at 23.4,24.52 h0.6
Bottom Overlay:
  circle w0.8: c18.585,13.13 r0.465
  lines w0.254: 28.105,6.705 28.105,14.285 ; 24.21,6.64 20.09,6.64 20.09,14.32 23.915,14.32 24.21,14.32 ; 24.21,6.64 33.025,6.64 33.025,14.32 24.21,14.32 ; 24.21,6.64 24.21,14.32 ; 6.9,0.485 14.48,0.485 14.48,5.63 14.405,5.705 6.94,5.705 6.9,5.665 6.9,0.485
  text "ISP Flasher" at 28.215,14.795 h0.8
  text "MISO" at 23.895,12.51 h1
  text "VTG" at 27.74,12.53 h1
  text "SCK" at 23.72,10.055 h1
  text "MOSI" at 27.75,10.025 h1
  text "GND" at 27.785,7.355 h1
  text "RST" at 23.405,7.3 h1
  text "Li-Po 3.7V" at 14.39,6.195 h0.8
  text "_" at 12.96,4.38 h1.5
  text "+" at 9.285,3.405 h1.5

## Text inside footprints (layer, text, board x,y; h text height)
U1: Top Overlay "*" at 10.836,21.983 h0.6; Mechanical 13 "*" at 13.757,21.221 h0.6